# Altium PCB Pop.PcbDoc
Units mil, origin at the board's own origin, x right, y up, seen from the top; angles counter-clockwise.
Board outline 5975.51 x 1968.5 mil, 4 copper layers (Top Layer, Internal Plane 1, Internal Plane 2, Bottom Layer), stack 30.634 mil thick; 89 components, 73 nets, 316 pads, 53 vias.
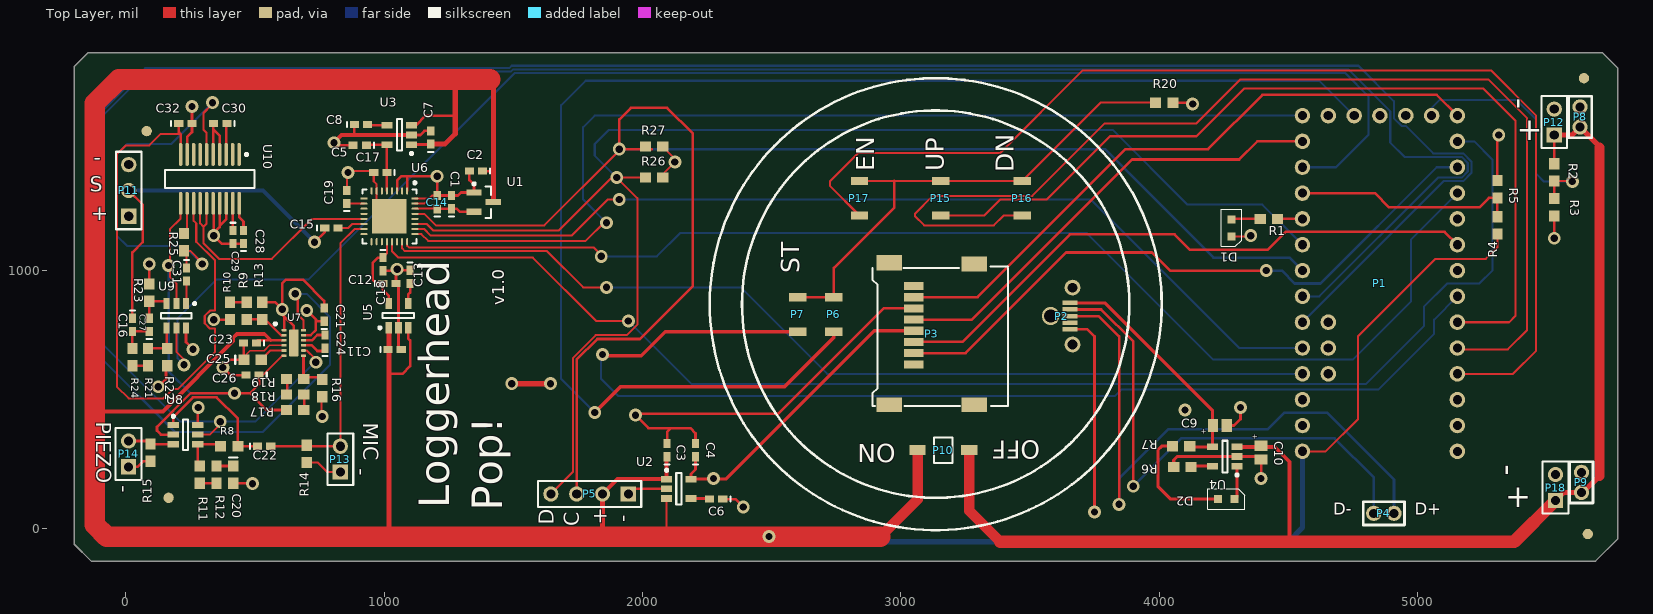
[diagram p0: Top Layer view]
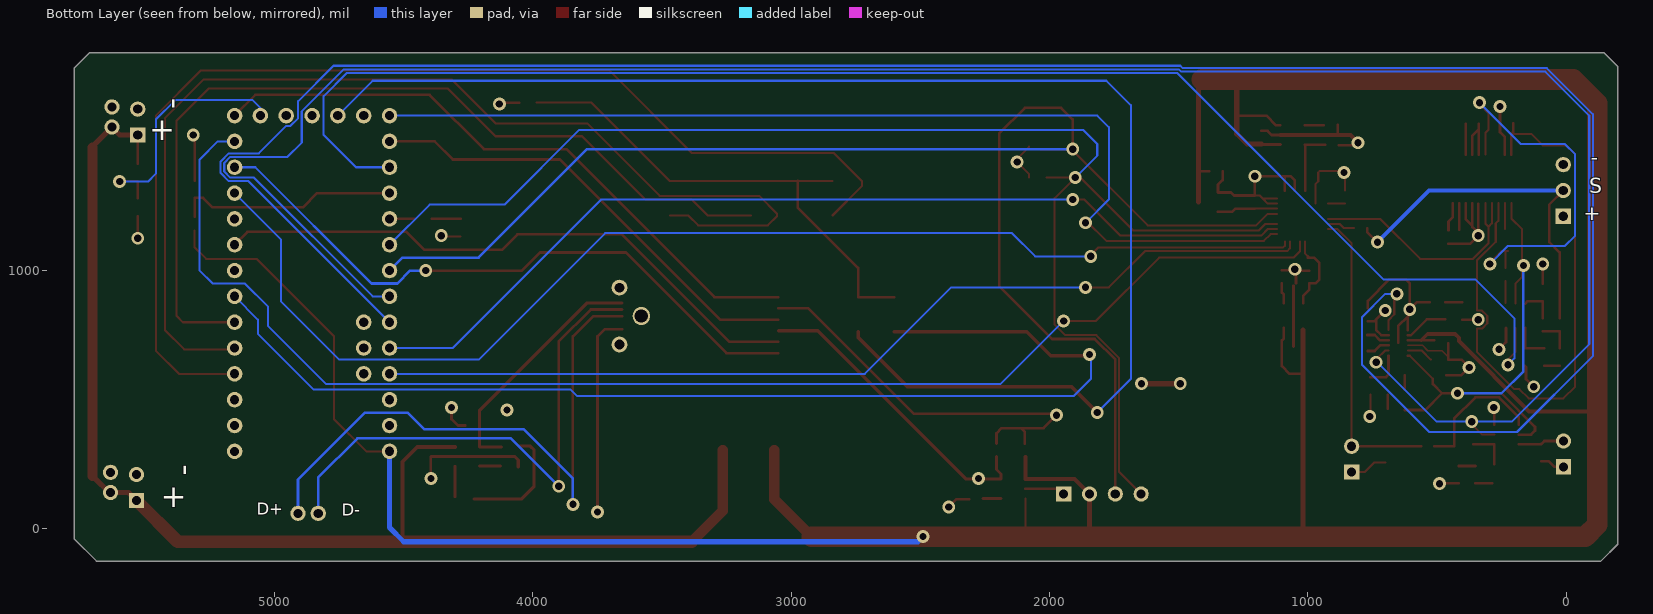
[diagram p1: Bottom Layer view, seen from below]
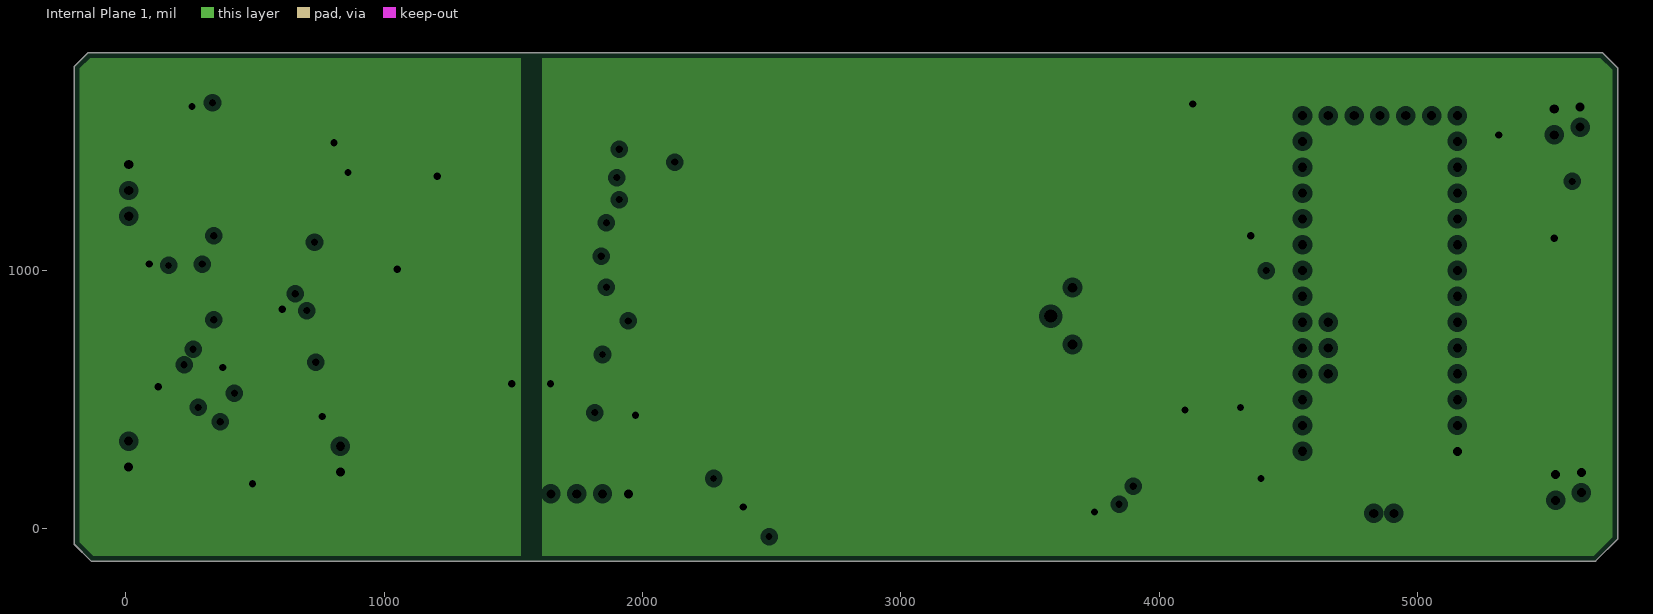
[diagram p2: Internal Plane 1, clearances drawn from the general rule]
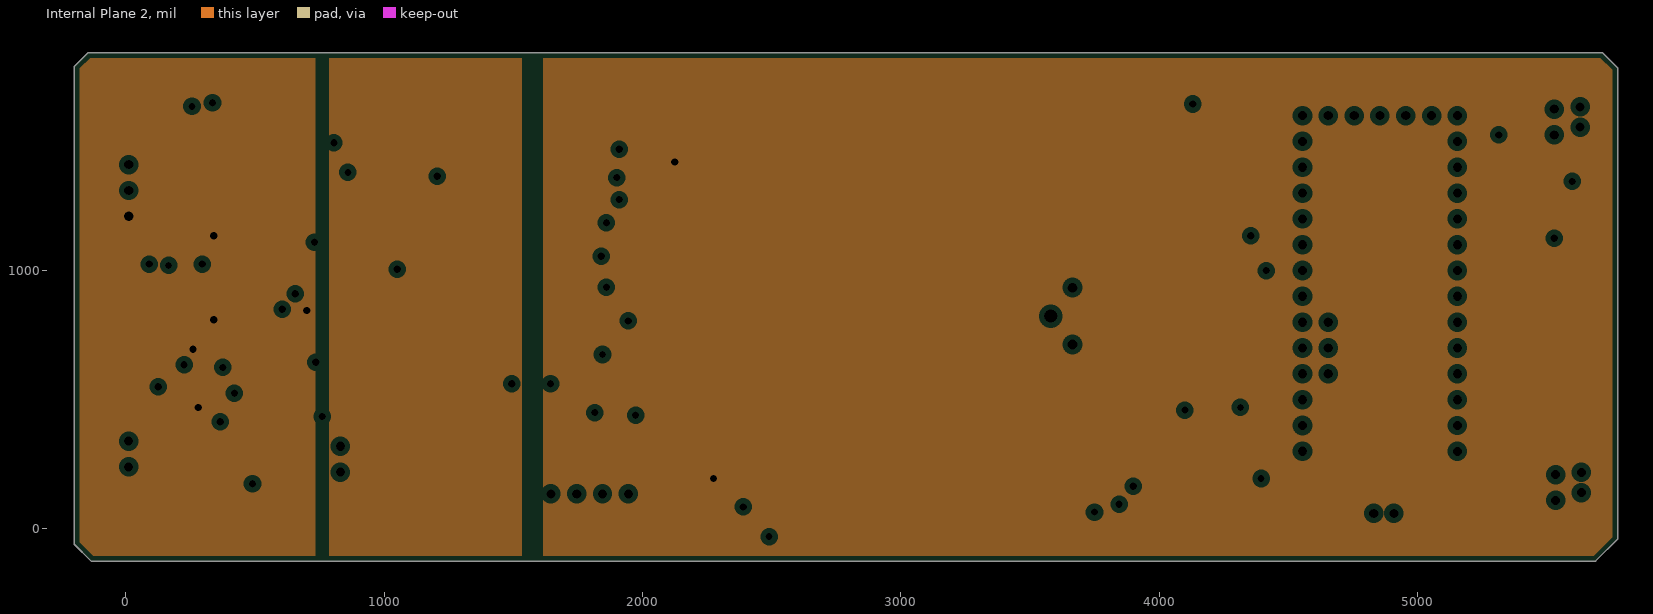
[diagram p3: Internal Plane 2, clearances drawn from the general rule]

## Layer stack, top to bottom
Top Solder: solder mask 0.4, Solder Resist, Dk 3.5
Top Layer: signal copper 1.4
Dielectric 1: core 10, FR-4, Dk 4.2
Internal Plane 1: plane copper 1.417, net (Multiple Nets)
Dielectric 3: prepreg 5, Dk 4.2
Internal Plane 2: plane copper 1.417, net (Multiple Nets)
Dielectric 2: core 10, Dk 4.2
Bottom Layer: signal copper 1.4
Bottom Solder: solder mask 0.4, Solder Resist, Dk 3.5

## Board outline
-135,-125 -200,-60 -200,1790 -146.5,1843.5 5716.5,1843.5 5775.51,1784.49 5775.51,-39.49 5690,-125

## Design rules (kind name [scope] priority, off if disabled: settings)
Clearance [All] p1: gap=6
PlaneClearance [All] p1: clearance=20
PlaneConnect [All] p1: planeconnectstyle=Relief reliefexpansion=20 reliefentries=4 reliefconductorwidth=10 reliefairgap=10
PolygonConnect [All] p1: connectstyle=Relief reliefconductorwidth=10 reliefentries=4 polygonreliefangle="90 Angle" airgapwidth=10
RoutingVias [All] p1: holewidth=28 width=50 viastyle="Through Hole" minholewidth=28 minwidth=50 maxholewidth=28 maxwidth=50
SolderMaskExpansion [All] p1: expansion=4
Width [All] p1: maxlimit=100 minlimit=6 preferedwidth=8
27 further rules are at their usual default settings.

## Classes and differential pairs
component class PopAudio: C1 C2 C5 C7 C8 C11 C12 C13 C14 C15 C16 C17 C18 C19 C20 C21 C22 C23 C24 C25 C26 C27 C28 C29 C30 C31 C32 P11 P13 P14 R8 R9 R10 R11 R12 R13 R14 R15 R16 R17 R18 R19 R21 R22 R23 R24 R25 U1 U3 U5 U6 U7 U8 U9 U10
component class Pop: C3 C4 C6 C9 C10 D1 D2 P1 P2 P3 P4 P5 P6 P7 P8 P9 P10 P12 P15 P16 P17 P18 R1 R2 R3 R4 R5 R6 R7 R20 R26 R27 U2 U4

## Components (designator, comment, footprint, x,y, rotation, side; value= is the part's Value field where it differs from the comment)
C1 "1.0uF" 0402 1260,1265 r90 top
C2 "1.0uF" 0402 1355,1385 r180 top
C3 "1.0uF" 0402 2095,305 r90 top
C4 "1.0uF" 0402 2205,305 r90 top
C5 "1.0uF" 0402 905,1485 r180 top
C6 "10nF" 0402 2285,115 r180 top
C7 "1.0uF" 0402 1180,1515 r90 top
C8 "10nF" 0402 910,1565 r0 top
C9 "1uF" Tant0805 4235,400 r180 top
C10 "1uF" Tant0805 4395,295 r90 top
C11 "1.0uF" 0402 1040,695 r0 top
C12 "1.0uF" 0402 1020,950.51 r0 top
C13 "10nF" 0402 1100,975.51 r270 top
C14 "0.1uF" 0402 1205,1265 r90 top
C15 "1.0uF" 0402 795,1165 r0 top
C16 "15n" 0402 25,790 r270 top
C17 "0.1uF" 0402 985,1380 r180 top
C18 "0.1uF" 0402 995,1025 r270 top
C19 "0.1uF" 0402 855,1285 r90 top
C20 "C0603" 0603 415.51,210 r270 top
C21 "2.2uF" 0402 767.6,829.21 r90 top
C22 "100n" 0402 535,320 r0 top
C23 "2.2uF" 0402 480,720 r180 top
C24 "1.0uF" 0402 770,725 r90 top
C25 "C0603" 0603 490,655 r0 top
C26 "2.2uF" 0402 490,595 r180 top
C27 "15n" 0402 90,790 r90 top
C28 "1.0uF" 0402 455,1130 r90 top
C29 "100n" 0402 415,1130 r270 top
C30 "10uF" 0402 365,1570 r180 top
C31 "1.0uF" 0402 235,985 r270 top
C32 "3.3uF" 0402 230,1570 r0 top
D1 "LED_0603" Diode0603 4280,1165 r270 top
D2 "LED_0603" Diode0603 4260,115 r0 top
P1 "Teensy 3.2" Teensy3.x 5155,500 r0 top
P2 "microUSB-vert" MICROUSB-VERT 3655,875 r270 top
P3 "microSD-Molex" microSD_Molex_hinged 2955,1010 r0 top
P4 "USB" HDR_2x1_2mm 4910,60 r90 top
P5 "Display" HDR1X4 1945,135 r180 top
P6 "Tactile" Tactile-B3U-1000 2740.51,830 r270 top
P7 "Tactile" Tactile-B3U-1000 2600.51,830 r270 top
P8 "Battery _2mm" HDR_2x1_2mm 5630,1555 r0 top
P9 "Battery _2mm" HDR_2x1_2mm 5635,140 r0 top
P10 "DIP1" DIP1 3265,305 r180 top
P11 "HYDROPHONE" HDR1X3 10.51,1210 r90 top
P12 "Header 2" HDR1X2 5530,1525 r90 top
P13 "PIEZO" HDR1X2 830,220 r90 top
P14 "PIEZO" HDR1X2 10,240 r90 top
P15 "Tactile" Tactile-B3U-1000 3155,1280 r270 top
P16 "Tactile" Tactile-B3U-1000 3470,1280 r270 top
P17 "Tactile" Tactile-B3U-1000 2840,1280 r270 top
P18 "Header 2" HDR1X2 5535,110 r90 top
R1 "330" 3-0603 4425,1200 r180 top
R2 "40k" 3-0603 5530,1380 r90 top
R3 "100k" 3-0603 5530,1245 r90 top
R4 "100k" 3-0603 5310,1175 r270 top
R5 "100k" 3-0603 5310,1315 r270 top
R6 "2k" 3-0603 4090,240 r0 top
R7 "330" 3-0603 4085,320 r180 top
R8 "10k" 3-0603 400,320 r0 top
R9 "100k" 3-0603 467.6,844.21 r90 top
R10 "75k" 3-0603 402.6,844.21 r270 top
R11 "1k" 3-0603 285.51,210 r90 top
R12 "0x" 3-0603 350.51,210 r270 top
R13 "100k" 3-0603 527.6,844.21 r270 top
R14 "100k" 3-0603 700,290 r270 top
R15 "10M" 3-0603 95.51,295 r270 top
R16 "100k" 3-0603 760,545 r270 top
R17 "100k" 3-0603 655,460 r180 top
R18 "68k" 3-0603 655,520 r0 top
R19 "2.49k" 3-0603 655,580 r180 top
R20 "10k" 3-0603 4020,1650 r0 top
R21 "1k" 3-0603 85,665 r270 top
R22 "1k" 3-0603 160,665 r270 top
R23 "100" 3-0603 90,915 r90 top
R24 "100" 3-0603 25,665 r270 top
R25 "10M" 3-0603 225,1110 r90 top
R26 "4.7k" 3-0603 2045,1360 r180 top
R27 "4.7k" 3-0603 2045,1480 r0 top
U1 "MCP1700T-1802E/TT" SOT-23-TT3_N 1385,1265 r0 top
U2 "LP3985IM5-3.3" MF05A_N 2140.35,155 r0 top
U3 "LP3985IM5-3.3" MF05A_N 1058.46,1525 r180 top
U4 "MCP73831T-2DCI/OT" SOT-23-OT5_N 4254.49,280 r180 top
U5 "LP3985IM5-3.3" MF05A_N 1055,825.51 r90 top
U6 "SGTL5000" QFN32 1020,1210 r270 top
U7 "LM27762" SOP12 612.6,769.21 r0 top
U8 "ADA4805-1" ADI-RJ-6_N 230.51,365 r0 top
U9 "ADA4805-1" ADI-RJ-6_N 195,825 r270 top
U10 "AD8436" AD8436 325,1355 r270 top

## Footprints (in the part's own frame and the unit in brackets; to place one, negate y for a bottom-side part, rotate by r counter-clockwise, add the part's x,y. Pads: shape width x height; smd on the part's side, far side on the other; paste and mask are expansions set on the pad)
3-0603 [mm] "Chip Resistor; Body 1.6 x 0.9 mm (LxW typ)"
  rect 1.1x1 smd: 1(-0.85,0) 2(0.85,0)
0402 [mm] "Chip Capacitor; Body 1.0 x 0.5 mm (LxW typ)"
  rect 0.9x0.7 smd: 1(-0.65,0) 2(0.65,0)
  silkscreen extent -1.4,-0.25 -1.4,0.25
0603 [mm] "Chip Capacitor; Body 1.6 x 0.8 mm (LxW typ)"
  rect 1.1x1 smd: 1(-0.85,0) 2(0.85,0)
  silkscreen extent -1.7,-0.4 -1.7,0.4
AD8436 [mm] "RMS to DC"
  oval 2.25x0.35 smd: 1(-2.4,2.88) 2(-2.4,2.24) 3(-2.4,1.6) 4(-2.4,0.96) 5(-2.4,0.32) 6(-2.4,-0.32) 7(-2.4,-0.96) 8(-2.4,-1.6) 9(-2.4,-2.24) 10(-2.4,-2.88) 11(2.4,-2.88) 12(2.4,-2.24) 13(2.4,-1.6) 14(2.4,-0.96) 15(2.4,-0.32) 16(2.4,0.32) 17(2.4,0.96) 18(2.4,1.6) 19(2.4,2.24) 20(2.4,2.88)
  silkscreen extent -2.52,-4.4 0.87,4.4, body extent -2,-4.4 2,4.4, height 1.75
ADI-RJ-6_N [mm] "SOT23, 6-Leads, Body 2.9x1.6mm, Pitch 0.95mm, IPC Medium Density"
  rect 1.1x0.6 smd: 1(-1.2,0.95) 2(-1.2,0) 3(-1.2,-0.95) 4(1.2,-0.95) 5(1.2,0) 6(1.2,0.95)
  silkscreen extent -1.32,-1.5 0.25,1.92, body extent -0.85,-1.5 0.85,1.5, height 1.45
Diode0603 [mm]
  rect 0.8x0.8 smd: A(-0.825,0) K(0.825,0)
  silkscreen extent -1.83,-1 1.8,1
DIP1 [mm]
  rect 1.6x1 smd: 1(0,0) 2(5.08,0)
  silkscreen extent 1.63,-1.25 3.45,1.29
HDR1X2 [mm] "Connector; Header; 2 Position"
  rect 1.5x1.5 hole 0.9: 1(0,0)
  round 1.5 hole 0.9: 2(2.54,0)
  silkscreen extent -1.27,-1.27 3.81,1.27
HDR1X3 [mm] "Connector; Header; 3 Position"
  rect 1.5x1.5 hole 0.9: 1(0,0)
  round 1.5 hole 0.9: 2(2.54,0) 3(5.08,0)
  silkscreen extent -1.27,-1.27 6.35,1.27
HDR1X4 [mm] "Connector; Header; 4 Position"
  rect 1.5x1.5 hole 0.9: 1(0,0)
  round 1.5 hole 0.9: 2(2.54,0) 3(5.08,0) 4(7.62,0)
  silkscreen extent -1.27,-1.27 8.89,1.27
HDR_2x1_2mm [mm]
  round 1.5 hole 0.9: 1(0,0.016) 2(0,2)
  silkscreen extent -1.14,-1.02 1.14,3.05
MF05A_N [mm] "SOT23, 5-Leads, Body 2.9x1.6mm, Pitch 0.95mm, Lead Span 2.8mm, IPC Medium Density"
  rect 1.1x0.65 smd: 1(-1.2,0.95) 2(-1.2,0) 3(-1.2,-0.95) 4(1.2,-0.95) 5(1.2,0.95)
  silkscreen extent -1.32,-1.55 0.25,1.95, body extent -0.9,-1.55 0.9,1.55, height 1.19
microSD_Molex_hinged [mm]
  rect 2.5x1.45 smd: 0(0,-13.45) 0(8.382,-13.462)
  rect 2.5x1.5 smd: 0(0,0.508) 0(8.382,0.381)
  rect 1.9x0.8 smd: 1(2.4,-9.475) 2(2.4,-8.375) 3(2.4,-7.275) 4(2.4,-6.175) 5(2.4,-5.075) 6(2.4,-3.975) 7(2.4,-2.875) 8(2.4,-1.775)
  silkscreen extent -1.65,-13.59 11.68,0.13
MICROUSB-VERT [mm] "Molex 05133-0011"
  rect 0.45x1.5 smd: 1(0,0) 2(0.65,0) 3(1.3,0) 4(1.95,0) 5(2.6,0)
  round 1.55 hole 0.95: ""(-1.5,0.25) ""(4.1,0.25)
  oval 1.8x1.7 hole 1.3: ""(1.3,-1.9)
  body extent -2.67,-3.05 5.35,1.4, height 7.53
QFN32 [mm]
  oval 0.7x0.2 smd: 1(-2.5,1.75) 2(-2.5,1.25) 3(-2.5,0.75) 4(-2.5,0.25) 5(-2.5,-0.25) 6(-2.5,-0.75) 7(-2.5,-1.25) 8(-2.5,-1.75) 17(2.5,-1.75) 18(2.5,-1.25) 19(2.5,-0.75) 20(2.5,-0.25) 21(2.5,0.25) 22(2.5,0.75) 23(2.5,1.25) 24(2.5,1.75)
  oval 0.2x0.7 smd: 9(-1.75,-2.5) 10(-1.25,-2.5) 11(-0.75,-2.5) 12(-0.25,-2.5) 13(0.25,-2.5) 14(0.75,-2.5) 15(1.25,-2.5) 16(1.75,-2.5) 25(1.75,2.5) 26(1.25,2.5) 27(0.75,2.5) 28(0.25,2.5) 29(-0.25,2.5) 30(-0.75,2.5) 31(-1.25,2.5) 32(-1.75,2.5)
  rect 3.4x3.4 smd paste-1.2: 33(0,0)
  silkscreen extent -3.42,-2.65 2.65,2.65, body extent -2.5,-2.5 2.5,2.5, height 1
SOP12 [mm]
  rrect50% 0.5x0.25 smd: 1(0,0) 2(0,-0.5) 3(0,-1) 4(0,-1.5) 5(0,-2) 6(0,-2.5) 7(1.9,-2.5) 8(1.9,-2) 9(1.9,-1.5) 10(1.9,-1) 11(1.9,-0.5) 12(1.9,0)
  rrect25% 0.95x2.65 smd paste-0.26: 13(0.95,-1.25)
  silkscreen extent -1,0.5 -0.75,0.75
SOT-23-OT5_N [mm] "SOT23, 5-Leads, Body 2.9x1.7mm, Pitch 0.95mm, Lead Span 2.8mm, IPC Medium Density"
  rect 1.1x0.65 smd: 1(-1.2,0.95) 2(-1.2,0) 3(-1.2,-0.95) 4(1.2,-0.95) 5(1.2,0.95)
  silkscreen extent -1.33,-1.55 0.25,1.95, body extent -0.9,-1.55 0.9,1.55, height 1.45
SOT-23-TT3_N [mm] "SOT23, 3-Leads, Body 2.9x1.3mm, Pitch 0.95mm, Lead Span 2.4mm, IPC Medium Density"
  rect 1.5x0.6 smd: 1(-0.95,0.95) 2(-0.95,-0.95) 3(0.95,0)
  silkscreen extent -1.07,-1.55 0.7,1.92, body extent -0.7,-1.52 0.7,1.53, height 1.12
Tactile-B3U-1000 [mm]
  rect 0.8x1.7 smd: 1(-1.7,0) 2(1.7,0)
Tant0805 [mil]
  rect 40x50 smd: 1(-26.5,0) 2(26.5,0)
Teensy3.x [mil]
  round 60 hole 35: 0(0,-100) GND(0,-200)
  round 60 hole 36: 1(0,0) 2(0,100) 3(0,200) 3.3V2(-200,1100) 4(0,300) 5(0,400) 6(0,500) 7(0,600) 8(0,700) 9(0,800) 10(0,900) 11(0,1000) 12(0,1100) 13(-600,1100) 14(-600,1000) 15(-600,900) 16(-600,800) 17(-600,700) 18(-600,600) 19(-600,500) 20(-600,400) 21(-600,300) 22(-600,200) 23(-600,100) A10(-500,200) A11(-500,300) A14(-500,1100) AGND(-600,-100) AREF(-500,100) GND2(-300,1100) PGM(-400,1100) VBat(-100,1100) Vin(-600,-200)
  round 60 hole 36 paste+0: 3.3V(-600,0)

## Part data
C1 C2 C3 C4 C5 C6 C7 C8 C11 C12 C13 C14 C15 C16 C17 C18 C19 C21 C22 C23 C24 C26 C27 C28 C29 C30 C31 C32: library part C0402, "Ceramic Chip Capacitor - Standard"
C9 C10: library part Tant0805
C20 C25: "Ceramic Chip Capacitor - Standard"
P1: library part Teensy3.x
P2: "Molex 105133-0011"
P3: library part microSD_Molex_hinged
P4 P8 P9: library part HDR_2x1_2mm, "Charging Connector"
P5: library part "Header 4", "Header, 4-Pin"
P6 P7 P15 P16 P17: library part Tactile_B3U-1000
P11: library part "Header 3", "Header, 3-Pin"
P12 P18: "Header, 2-Pin"
P13 P14: library part "Header 2", "Header, 2-Pin"
R1 R2 R3 R4 R5 R6 R7 R8 R9 R10 R11 R12 R13 R14 R15 R16 R17 R18 R19 R20 R21 R22 R23 R24 R25 R26 R27: library part ERJ3RK, "Precision Thick Film Chip Resistor, 10 Ohm to 1M Ohm Range, 1% and 0.5% Tolerance, 0603 Size, 0.063 W"
U1: "Low Quiescent Current LDO, 3-Pin SOT-23, Extended Temperature, Tape and Reel"
U2 U3 U5: "Micropower, 150mA Low-Noise Ultra Low-Dropout CMOS Voltage Regulator"
U4: "Miniature Single-Cell, Fully Integrated Li-Ion, Li-Polymer Charge Management Controller, 4.2V, 5-Pin SOT-23, Industrial Temperature, Tape and Reel"
U7: "Pos and Neg Output Charge pump plus LDO"
U8 U9: library part ADA4841-1YRJZ-RL, "Single Channel Low Wide Band Noise Operational Amplifier, 80 MHz BW, 13 V/us SR, Industrial, 6-pin SOT23 (RJ-6), Reel"
U10: "RMS to DC"

## Free pads (board coordinates)
  round 40 smd paste-20 mask+5: 0(80,1540) 0(165,120) 0(5645,1745) 0(5660,-20)

## Via types
v1: diameter 50, hole 28, Top Layer to Bottom Layer, 53 vias

## Nets (pads, with @x,y where several pads share a name; then routed paths per layer and width w, separated by ;. In a path a pad name is that pad's centre, name@x,y a point inside that pad or via, vN(x,y) a via of type N, cw(c..) or ccw(c..) an arc to the next point about the centre after c; other vN are vias at no path point)
AGND: C1.2 C2.2 C5.2 C7.2 C8.1 C11.2 C12.2 C13.1 C14.2 C17.2 C18.2 C19.2 C20.2 C21.2 C23.2 C25.1 C26.2 C32.2 P11.3 P13.1 P14.1 R13.1 R14.2 R15.2 R16.2 R22.2 R23.2 U1.1 U3.2 U5.2 U6.1 U6.3 U6.7 U6.31 U6.32 U6.33 U7.1 U7.4 U7.13 U10.9 | length 3759.9
  Top Layer w6: C25.1@456.54,666.54 480,690 535,690 555.16,710.16 U7.4
  Top Layer w8: R14.2 743.46,256.54 780,220 P13.1 ; v1@757.09,437.91 R16.2@757.09,520.75 ; C19.2 855,1370 870,1385 C17.2@954.41,1385 ; C17.2 959.41,1345.59 970.79,1334.21 U6.7 U6.33@970.79,1259.21 ; U6.31 1154.21,1259.21 1173.9,1278.9 ; U6.32 1173.9,1278.9 ; C14.2 1185.59,1290.59 1173.9,1278.9
  Top Layer w10: P14.1@-14.49,240 45,240 66.54,261.54 R15.2 ; R23.2 v1(90,1025) ; v1(125,550) 155,580 155,626.54 R22.2 ; U10.9 236.81,1516.81 255.59,1535.59 C32.2 v1(255.59,1635.59) ; C20.2 v1@488.46,176.54 ; C23.2@456.54,717.87 456.54,666.54 C25.1 405,655 v1(375,625) 405,595 C26.2 ; R13.1 577.32,877.68 v1(605,850) ; U7.1 612.6,822.4 ; U7.13 650,785 612.6,822.4 ; C21.2 767.6,882.4 685,965 620,965 605,950 v1(605,850) ; v1@820,1495 v1(805,1495) 815,1485 C5.2 ; 884.41,1529.41 C8.1 ; C18.2 v1@1044.41,999.41 ; C12.2 v1@1045.59,1000.59 ; U6.3 1049.53,1349.53 1065,1365 v1(1205,1365) C14.2 C1.2 1285.59,1290.59 1297.4,1302.4 U1.1 1347.6,1332.4 1329.41,1350.59 C2.2 ; v1@1053.9,1001.1 C13.1 ; C11.2@1055,706.1 U5.2 C12.2@1055,941.1 ; U6.1 1088.9,1363.9 ; U3.2 1140,1525 1155.59,1540.59 C7.2 ; v1(605,850) 605,830 612.6,822.4
  Top Layer w15: v1(805,1495) 834.19,1524.34 U3.2
  other v1: 490,175 760,435 1493.58,562.05 1050,1005 859.41,1380
BCLK: P1.9 U6.24 | length 4751.6
  Top Layer w8: U6.24 1088.9,1096.1 1095,1090 1810,1090 v1@1845,1055
  Bottom Layer w8: v1(1840,1055) 2055,1055 2145,1145 3720,1145 4210,655 4750,655 4975,880 4975,1120 P1.9
BUTGND: P6.1 P7.1 P15.1 P16.1 P17.1 R20.1 | length 1959.2
  Top Layer w8: P17.1 2975,1346.93 P15.1 P16.1 3773.07,1650 R20.1
  Top Layer w10: P7.1 P6.1 2740.51,1010.51 2975,1245 2975,1346.93
CS: P1.10 P3.2 | length 2498
  Top Layer w10: P3.2 3250.28,680.28 3640,1070 3972.37,1070 4042.37,1000 v1@4410,1000
  Bottom Layer w10: v1(4415,1000) 4475,1000 4525,950 4625,950 5075,1400 P1.10
D+: P2.3 P4.1 | length 2385.7
  Top Layer w10: P2.3 3766.18,823.82 3845,745 v1(3845,95) v1@3845,90
  Bottom Layer w10: v1(3845,95) 3845,195 4035,385 4420,385 4485,450 4650,450 4909.37,190.63 P4.1
D-: P2.2 P4.2 | length 2065.8
  Top Layer w10: P2.2 3775.59,849.41 3900,725 v1(3900,165)
  Bottom Layer w10: v1(3900,165) 4085,350 4680,350 4831.26,198.74 P4.2
DGND: C3.2 C4.2 C6.1 C9.1 C10.1 D1.K P1.GND P2.5 P3.6 P5.1 P8.2 P9.2 P12.2 P18.2 R3.1 R5.1 R6.1 R20.2 U2.2 U4.2 | length 3607.8
  Top Layer w8: D1.K v1@4352.52,1132.52 ; v1(5530,1125) R3.1
  Top Layer w10: P5.1 1965,155 U2.2 ; v1(1973.11,440) 2023.11,390 2110,390 ; v1@1975,445 2525,445 2933.5,853.5 P3.6 ; C3.2 2095,375 2110,390 ; C4.2 2205,370 2185,390 2110,390 ; C6.1 2360,115 v1(2390,85) ; P2.5 3722.36,772.64 3750,745 v1(3750,65) ; R20.2 v1@4125,1650 ; C9.1 4290,400 4315,425 v1(4315,470) ; U4.2 C10.1@4393.5,280 ; v1(4395,195) C10.1@4395,278.5 ; R5.1 v1@5310,1520
  Top Layer w12: R6.1 4056.54,266.54 4070,280 U4.2
  other v1: 4100,460 1643.58,562.05 4355,1135 5315,1525 4130,1645
DN: P1.3 P16.2 | length 4225.9
  Top Layer w8: P16.2 3398.07,1213.07 3360,1175 3090,1175 3055,1210 3055,1220 3124,1289 3509,1289 3790,1570 4145,1570 4315,1740 5275,1740 5425,1590 5425,770 5350,695 5160,695 P1.3
ENT: P1.2 P17.2 | length 4417.4
  Top Layer w8: P17.2 2725,1328.07 2725,1345 2835,1455 3385,1455 3705,1775 5285,1775 5460,1600 5460,690 5370,600 P1.2
HPF_EN: P1.15 U9.5 | length 5837.2
  Top Layer w8: U9.5 195,685 v1@235,645
  Bottom Layer w8: v1(225,635) 200,660 200,815 350,965 705,965 1505,1765 4720,1765 4810,1675 4810,1525 4685,1400 P1.15
HPF_OUT: C31.2 U9.1 | length 84.6
  Top Layer w8: U9.1@235,874.84 C31.2
HYDRO_EN: P1.21 U7.12 | length 9087.8
  Top Layer w8: v1(655,910) 665,900 665,830.5 687.4,808.1 U7.12
  Bottom Layer w8: v1@660,910 700,910 790,820 790,635 530,375 190,375 -104,669 -104,1605.8 74.2,1784 1484.4,1784 1493.4,1793 4772,1793 4909,1656 4909,1589.43 4938.43,1560 4955,1560 5061,1454 5177.37,1454 5209,1422.37 5209,1377.63 5177.37,1346 5101,1346 P1.21
HYDRO_EN-: P1.20 U7.8 U8.5 | length 8551.5
  Top Layer w8: U8.5 325,365 365,405 v1(365,415) ; U7.8 700.04,690.47 v1@730.51,660
  Bottom Layer w8: v1@732.5,647.5 500,415 v1(365,415) 210,415 -90,715 -90,1600 80,1770 1490.2,1770 1499.2,1779 4732.57,1779 4895,1616.57 4895,1495 4950,1440 5171.57,1440 5195,1416.57 5195,1383.43 5171.57,1360 5080,1360 4620,900 P1.20
  other v1: 735,645
HYDRO_L: C15.1 C16.1 P11.2 | length 1406.9
  Top Layer w10: P11.2 65,1255.51 65,1110 25,1070 C16.1 ; v1(730,1110) 770,1150 C15.1@770,1164.41
  Bottom Layer w15: P11.2 530,1310 v1(730,1110)
I2SDIN: P1.22 U6.26 | length 3743.4
  Top Layer w8: U6.26 1154.21,1160.79 1180,1135 1725,1135 1865,1275 v1(1910,1275)
  Bottom Layer w8: v1(1910,1275) 3735,1275 4310,700 P1.22
I2SDOUT: P1.13 U6.25 | length 3989.4
  Top Layer w8: U6.25 1143.9,1141.1 1170,1115 1780,1115 v1@1855,1190
  Bottom Layer w8: v1(1860,1185) 1770,1275 1770,1555 1815,1600 P1.13
IN_L: C15.2 U6.14 | length 107.4
  Top Layer w8: C15.2 860,1165 875.47,1180.47 U6.14
IN_R: U6.13 U10.14 U10.15 | length 967.2
  Top Layer w8: U10.14 287.2,1182.8 300,1170 ; U10.15 312.4,1182.4 300,1170 ; U6.13 720.16,1200.16 565,1045 360,1045 300,1105 300,1170
LED1: P1.17 R1.1 | length 96.5
  Top Layer w10: R1.1 P1.17
LRCLK: P1.23 U6.23 | length 3712.8
  Top Layer w8: U6.23 1069.21,1085.79 1080,1075 1630,1075 1770,935 v1(1860,935)
  Bottom Layer w8: v1(1860,935) 2380,935 2715,600 P1.23
MCLK: P1.11 U6.21 | length 5330.1
  Top Layer w8: U6.21 1029.84,1075.16 1055,1050 1575,1050 1820,805 v1(1945,805)
  Bottom Layer w8: v1(1945,805) 2190,560 4800,560 5025,785 5025,860 5115,950 5240,950 5290,1000 5290,1430 5220,1500 P1.11
MIC: C22.2 P13.2 R14.1 U6.15 | length 1194.1
  Top Layer w8: P13.2@830,295 830,1105 885.79,1160.79 U6.15
  Top Layer w10: C22.2 P13.2
MISO: P1.12 P3.7 | length 2463.1
  Top Layer w10: P3.7 3296.81,896.81 3870,1470 4190,1470 4400,1680 5075,1680 P1.12
MOSI: P1.7 P3.3 | length 2352.6
  Top Layer w10: P3.3 3238.58,723.58 3655,1140 4060,1140 4120,1080 4420,1080 4490,1150 5105,1150 P1.7
NetC6_2: C6.2 U2.4 | length 69.2
  Top Layer w12: U2.4 C6.2@2256.81,117.6
NetC8_2: C8.2 U3.4 | length 73
  Top Layer w10: C8.2@938.19,1562.4 U3.4
NetC13_2: C13.2 U5.4 | length 80.3
  Top Layer w10: U5.4 1092.4,907.4 1100,915 C13.2
NetC16_2: C16.2 C27.1 R24.1 | length 130.9
  Top Layer w10: R24.1 C16.2 C27.1
NetC19_1: C19.1 U6.10 | length 66.4
  Top Layer w8: C19.1@855.2,1259.21 U6.10
NetC20_1: C20.1 R12.1 | length 65
  Top Layer w10: R12.1 C20.1
NetC22_1: C22.1 R8.2 U8.1 | length 529.1
  Top Layer w10: U8.1 183.27,433.27 259,509 351,509 433.46,426.54 R8.2 C22.1
NetC24_1: C24.1 U7.9 | length 89.1
  Top Layer w10: U7.9 719.84,710.16 741.38,688.62 C24.1@767.6,688.62
NetC24_2: C24.2 U7.10 | length 91.2
  Top Layer w10: U7.10 719.84,729.84 740.59,750.59 C24.2
NetC25_2: C25.2 U7.5 | length 103.8
  Top Layer w8: C25.2 558.94,690.47 U7.5
NetC27_2: C27.2 R23.1 U9.3 | length 137.4
  Top Layer w10: C27.2 R23.1 148.31,881.54 U9.3
NetC28_2: C28.2 U10.20 | length 111.8
  Top Layer w10: U10.20 438.39,1206.61 455,1190 C28.2
NetC29_1: C29.1 U10.19 | length 103.1
  Top Layer w10: C29.1@413.19,1157.4 U10.19
NetC30_1: C30.1 U10.3 | length 117.9
  Top Layer w10: U10.3 C30.1@387.99,1567.4
NetC30_2: C30.2 U10.4 U10.5 | length 223.7
  Top Layer w10: U10.5 C30.2@337.6,1568.19 ; 340,1545 362.8,1522.2 U10.4
NetC31_1: C31.1 R25.1 U10.6 | length 1499.6
  Top Layer w8: R25.1 R25.1@235,1076.54 ; C31.1 R25.1@235,1076.54 ; v1@290,1035 248.46,1076.54 R25.1@235,1076.54 ; U10.6 312.4,1532.6 300,1545 300,1610 v1@330,1640
  Bottom Layer w8: v1(295,1025) 225,1095 5,1095 -35,1135 -35,1450 5,1490 175,1490 v1(335,1650)
NetC32_1: C32.1 U10.10 U10.13 | length 2441.6
  Top Layer w8: 211.61,1528.39 133.39,1528.39 90,1485 0,1485 -35,1450 -35,550 10,505 145,505 181,541 201,541 345,685 345,775 325.5,775 305,795.5 305,824.5 325.5,845 345,845 345,1038.79 272.2,1111.58 272.2,1182.8 262.01,1192.99 U10.13
  Top Layer w10: C32.1 204.41,1535.59 211.61,1528.39 U10.10
NetD1_A: D1.A R1.2 | length 111.5
  Top Layer w10: D1.A@4280,1200 R1.2
NetD2_A: D2.A R7.2 | length 456
  Top Layer w12: R7.2 4010,320 3995,305 3995,165 4045,115 D2.A
NetD2_K: D2.K U4.1 | length 118.3
  Top Layer w10: D2.K@4301.73,124.25 U4.1
NetP14_2: P14.2 R15.1 U8.3 | length 202.9
  Top Layer w10: P14.2@-14.49,340 83.98,340 R15.1 96.38,327.6 U8.3
NetR6_2: R6.2 U4.5 | length 81.2
  Top Layer w12: R6.2@4126.06,242.6 U4.5
NetR8_1: R8.1 R11.2 U8.4 | length 157.6
  Top Layer w10: R11.2@277.76,251.22 U8.4 R8.1@358.94,327.6
NetR9_1: R9.1 R13.2 U7.2 | length 170.4
  Top Layer w10: R9.1 R13.2 539.25,810.75 600.47,749.53 U7.2
NetR9_2: R9.2 R10.1 | length 65
  Top Layer w10: R10.1 R9.2
NetR11_1: R11.1 R12.2 | length 65
  Top Layer w10: R11.1 R12.2
NetR16_1: R16.1 R19.1 U7.7 | length 147.1
  Top Layer w10: U7.7 687.4,597.36 690.55,594.21 697.09,587.68 R16.1@757.09,587.68
NetR17_1: R17.1 R18.2 | length 55
  Top Layer w10: R17.1@690.55,464.21 R18.2@690.55,519.21
NetR18_1: R18.1 R19.2 | length 55
  Top Layer w10: R18.1@623.62,539.21 R19.2@623.62,594.21
NetR21_1: R21.1 R22.1 U9.4 | length 151.9
  Top Layer w10: R21.1 R22.1 ; R22.1@157.6,700.87 U9.4
NetR21_2: R21.2 R24.2 | length 60
  Top Layer w10: R24.2 R21.2
NetR25_2: R25.2 U10.12 | length 100.2
  Top Layer w8: R25.2@236.81,1160.28 U10.12
PGM: P1.PGM P6.2 | length 5470.5
  Top Layer w15: v1(1815,450) 1915,550 2550,550 2740.51,740.51 P6.2
  Bottom Layer w8: v1@1810,455 1685,580 1685,1640 1780,1735 4620,1735 P1.PGM
SCK: P1.14 P3.5 | length 1801.2
  Top Layer w10: P3.5 3275.2,810.2 3895,1430 4310,1430 4380,1500 P1.14@4565,1500
SCL: P1.19 P5.3 R27.1 U6.29 | length 6033.1
  Top Layer w8: U6.29 1155.16,1219.84 1200,1175 1620,1175 v1@1910,1465
  Top Layer w10: P5.3 1745,655 1825,735 1990,735 2195,940 2195,1530 2095,1630 1955,1630 1910,1585 v1(1910,1470) 2035,1470
  Bottom Layer w10: v1(1910,1470) 3790,1470 4210,1050 4505,1050 P1.19
SDA: P1.18 P5.4 R26.2 U6.27 | length 5568.5
  Top Layer w8: U6.27 1164.53,1180.47 1190,1155 1675,1155 1880,1360 v1(1900,1360) ; P5.4 1730,220 1730,661.21 1818.79,750 1939.5,750 1980,790.5 1980,1280 v1(1900,1360) ; R26.2 v1(1900,1360)
  Bottom Layer w8: v1(1900,1360) 1815,1445 1815,1490 1870,1545 3820,1545 4110,1255 4400,1255 P1.18
STOP: P1.5 P7.2 | length 4422.7
  Top Layer w15: v1@1840,670 1995,670 2088.07,763.07 P7.2
  Bottom Layer w8: v1@1840,670 1840,580 1905,515 3830,515 3855,540 4850,540 5065,755 5065,810 P1.5
  other v1: 1845,675
UP: P1.4 P15.2 | length 3470.9
  Top Layer w8: P15.2 3323.07,1213.07 3385,1275 3565,1275 3810,1520 4145,1520 4330,1705 5255,1705 5380,1580 5380,825 5355,800 P1.4
V_BACK: P1.VBat R2.1 R3.2 | length 977.5
  Top Layer w8: R3.2 R2.1 v1@5598.46,1346.54
  Bottom Layer w8: P1.VBat 5055,1630 5085,1660 5385,1660 5460,1585 5460,1375 5490,1345 v1(5600,1345)
V_BATT: C10.2 P8.1 P9.1 P10.1 P12.1 P18.1 R2.2 U4.3 | length 4982.7
  Top Layer w8: R2.2 P12.1
  Top Layer w15: U4.3 4447.6,317.4 4505,260 4505,-50
  Top Layer w20: P12.1 5599.37,1525 P8.1 5705,1480.63 5705,1475 ; P18.1 5565.63,140.63 P9.1 ; P9.1@5630,130 5705,205
  Top Layer w40: P10.1 3265,70 3385,-50 ; 5705,205 5705,1475
  Top Layer w50: 3385,-50 4505,-50 5375,-50 P18.1
VA: C5.1 C17.1 U3.5 U6.5 | length 256.1
  Top Layer w10: C5.1@933.19,1487.6 U3.5 ; U6.5 U3.5@1010.16,1486.54
VCC: C4.1 P3.4 R26.1 R27.2 U2.5 | length 1339.2
  Top Layer w8: R26.1 2078.46,1373.46 v1(2125,1420) ; R27.2 v1@2125,1433.46
  Top Layer w12: C4.1 2205,230 2187.6,212.6 U2.5 2322.4,192.4 2896.89,766.89 P3.4
  other v1: 2275,195
VDDD: C1.1 C14.1 U1.2 U6.30 | length 229.2
  Top Layer w8: U6.30 C14.1@1200.12,1239.53
  Top Layer w10: C14.1 C1.1 1280.59,1239.41 1292.4,1227.6 U1.2
VDDIO: C12.1 C18.1 U5.5 U6.20 | length 318.9
  Top Layer w8: C18.1 1010.16,1065.75 U6.20
  Top Layer w10: C18.1@1000.59,1050 975,1050 955,1030 955,965 969.49,950.51 C12.1 994.41,925.59 1017.6,902.4 U5.5
VH: C21.1 C28.1 C29.2 P11.1 R10.2 U7.11 U8.6 U9.6 U10.16 U10.17 U10.18 | length 865.6
  Top Layer w10: U9.6 232.4,722.6 v1(260,695) ; U8.6 v1@277.76,457.24 ; v1(340,810) R10.2@401.85,810 ; U10.16@340,1258.11 v1@340,1145 ; U10.17 362.8,1172.8 ; U10.18 387.99,1197.99 362.8,1172.8 ; C28.1 C29.2 370.59,1104.41 v1(340,1135) v1@340,1145 ; U7.11 714.53,749.53 735,770 735,810 ; v1(700,845) 735,810 ; C21.1 741.38,803.62 735,810 ; v1@340,1145 362.8,1167.8 362.8,1172.8
  other v1: 280,470
VH-: C26.1 R17.2 U7.6 U8.2 U9.2 U10.11 | length 1989.6
  Top Layer w8: U9.2 195,950.43 170,975.43 170,1160 211.61,1201.61 U10.11 ; 515.59,580.59 U7.6@605.79,670.79
  Top Layer w10: U8.2 135,365 120,380 120,395 250,525 v1(420,525) 480,525 ; 515.59,580.59 515.59,560.59 480,525 ; U7.6@605.79,670.79 U7.6 ; R17.2@623.62,460 545,460 480,525
  Bottom Layer w10: v1(165,1020) 165,610 250,525 v1(420,525)
VIN: C2.1 C3.1 C7.1 C11.1 C23.1 P1.Vin P5.2 P10.2 R4.2 U1.3 U2.1 U2.3 U3.1 U3.3 U5.1 U5.3 U7.3 | length 14110.2
  Top Layer w8: 2093.11,-26.89 U2.3 ; P1.Vin 4645,300 4770,425 4770,745 5070,1045 5265,1045 5310,1090 R4.2@5310,1155
  Top Layer w10: C23.1@510.67,729.84 U7.3 ; 1018.27,600 1070,600 1100,630 1100,730 1092.4,737.6 U5.3 ; U3.3 1122.4,1562.4 1160,1600 1275,1600 ; C2.1 1422.4,1385 ; 1409.34,1740 1422.4,1726.94
  Top Layer w12: U3.1 C7.1@1178.19,1487.6
  Top Layer w14: 535.51,755 560.51,730
  Top Layer w15: -121,455 143.28,455 415,726.72 415,740 430,755 535.51,755 ; P5.2 1902.4,192.4 U2.1 C3.1@2093.11,277.52
  Top Layer w20: 1018.27,-16.73 1018.27,600 U5.1@1018.27,770 ; C7.1 1234.41,1489.41 1275,1530 1275,1600 1275,1740 ; U1.3 1422.4,1385 1422.4,1726.94 ; 1845,-5 P5.2
  Top Layer w40: 2900,-50 2920,-30 3065,115 P10.2
  Top Layer w80: 1409.34,1740 1275,1740 -28.34,1740 -121,1647.34 -121,455 -121,16 -75,-30 v1(2490,-30) 2920,-30
  Bottom Layer w20: v1(2490,-30) 2510,-50 4500,-50 4555,5 P1.Vin
VSENS: P1.16 R4.1 R5.2 | length 876
  Top Layer w10: P1.16@4545,1300 P1.16 4835,1300 4890,1245 5240,1245 5276.54,1281.54 R5.2 R4.1
XVUSB: C9.2 P2.1 R7.1 U4.4 | length 951.6
  Top Layer w12: P2.1 3790,875 4207.24,457.76 U4.4 R7.1@4121.06,317.4
pads on no net: P1.0 P1.1 P1.3.3V P1.3.3V2 P1.6 P1.8 P1.A10 P1.A11 P1.A14 P1.AGND P1.AREF P1.GND2 P2. P2.4 P3.0 P3.1 P3.8 U6.2 U6.4 U6.6 U6.8 U6.9 U6.11 U6.12 U6.16 U6.17 U6.18 U6.19 U6.22 U6.28 U10.1 U10.2 U10.7 U10.8
copper on no net: | length 150
  Top Layer w20: 1493.58,562.05 1643.58,562.05

## Polygon pours and split planes (outlines as drawn)
DGND on Internal Plane 1 (split plane): 5755.41,1776.16 5755.41,-31.16 5681.68,-104.9 1610,-104.9 1610,1823.41 5708.17,1823.41
AGND on Internal Plane 1 (split plane): 1530,-104.9 -126.68,-104.9 -179.9,-51.68 -179.9,1781.68 -138.17,1823.41 1530,1823.41
VA on Internal Plane 2 (split plane): 1534.25,-104.9 785.75,-104.9 785.75,1823.41 1534.25,1823.41
VCC on Internal Plane 2 (split plane): 5755.41,1776.16 5755.41,-31.16 5681.68,-104.9 1614.25,-104.9 1614.25,1823.41 5708.17,1823.41
VH on Internal Plane 2 (split plane): 735,-104.9 -126.68,-104.9 -179.9,-51.68 -179.9,1781.68 -138.17,1823.41 735,1823.41

## Other copper
Internal Plane 1 (plane layer: these items are gaps in the copper):
  pour cut-out: 1530,1843.5 1531.5,1845 1610,1845 1610,-125 1530,-125
Internal Plane 2 (plane layer: these items are gaps in the copper):
  pour cut-out: 1534.25,1843.5 1535.75,1845 1614.25,1845 1614.25,-125 1534.25,-125
  pour cut-out: 735,1834.25 785.75,1834.25 785.75,-134.25 735,-134.25

## Silkscreen, mask and mechanical layers (free items; w line width, h text height)
Top Overlay:
  circle w10: c3135,870 r875
  circle w10: c3135,870 r750
  text "-" at 5455,1625 h150 r90
  text "+" at 5385,1475 h150
  text "-" at -125,1390 h100
  text "EN" at 2920,1385 h120 r90
  text "UP" at 3190,1385 h120 r90
  text "DN" at 3460,1380 h120 r90
  text "S" at -140,1285 h100
  text "+" at -135,1175 h100
  text "ST" at 2630,990 h120 r90
  text "v1.0" at 1480,865 h80 r90
  text "PIEZO" at -135,415 h100 r270
  text "MIC" at 900,410 h100 r270
  text "OFF" at 3540,365 h120 r180
  text "ON" at 2980,350 h120 r180
  text "-" at 950,205 h100 r90
  text "-" at 5410,205 h150 r90
  text "-" at 30,140 h100 r90
  text "Loggerhead" at 1290,80 h200 r90
  text "Pop!" at 1495,70 h200 r90
  text "+" at 5340,55 h150
  text "D-" at 4675,40 h80
  text "D+" at 4990,40 h80
  text "-" at 1970,25 h100 r90
  text "D" at 1675,15 h100 r90
  text "+" at 1880,15 h100 r90
  text "C" at 1775,10 h100 r90
Bottom Overlay:
  text "-" at 5455,1625 h150 r90
  text "+" at 5385,1475 h150
  text "-" at -125,1390 h100
  text "S" at -90,1280 h100
  text "+" at -135,1175 h100
  text "-" at 5410,205 h150 r90
  text "+" at 5340,55 h150
  text "D+" at 5070,40 h80
  text "D-" at 4740,35 h80
Mechanical 1:
  the board outline again, w10

## Text inside footprints (layer, text, board x,y; h text height)
C9: Top Overlay "+" at 4185,385 h19.68 r180
C10: Top Overlay "+" at 4380,345 h19.68 r90